# Altium PCB AS5048B_Breakout.PcbDoc
Units mil, origin at the board's own origin, x right, y up, seen from the top; angles counter-clockwise.
Board outline 1104.99 x 899.97 mil, 2 copper layers (Top Layer, Bottom Layer); 14 components, 9 nets, 46 pads, 48 vias.
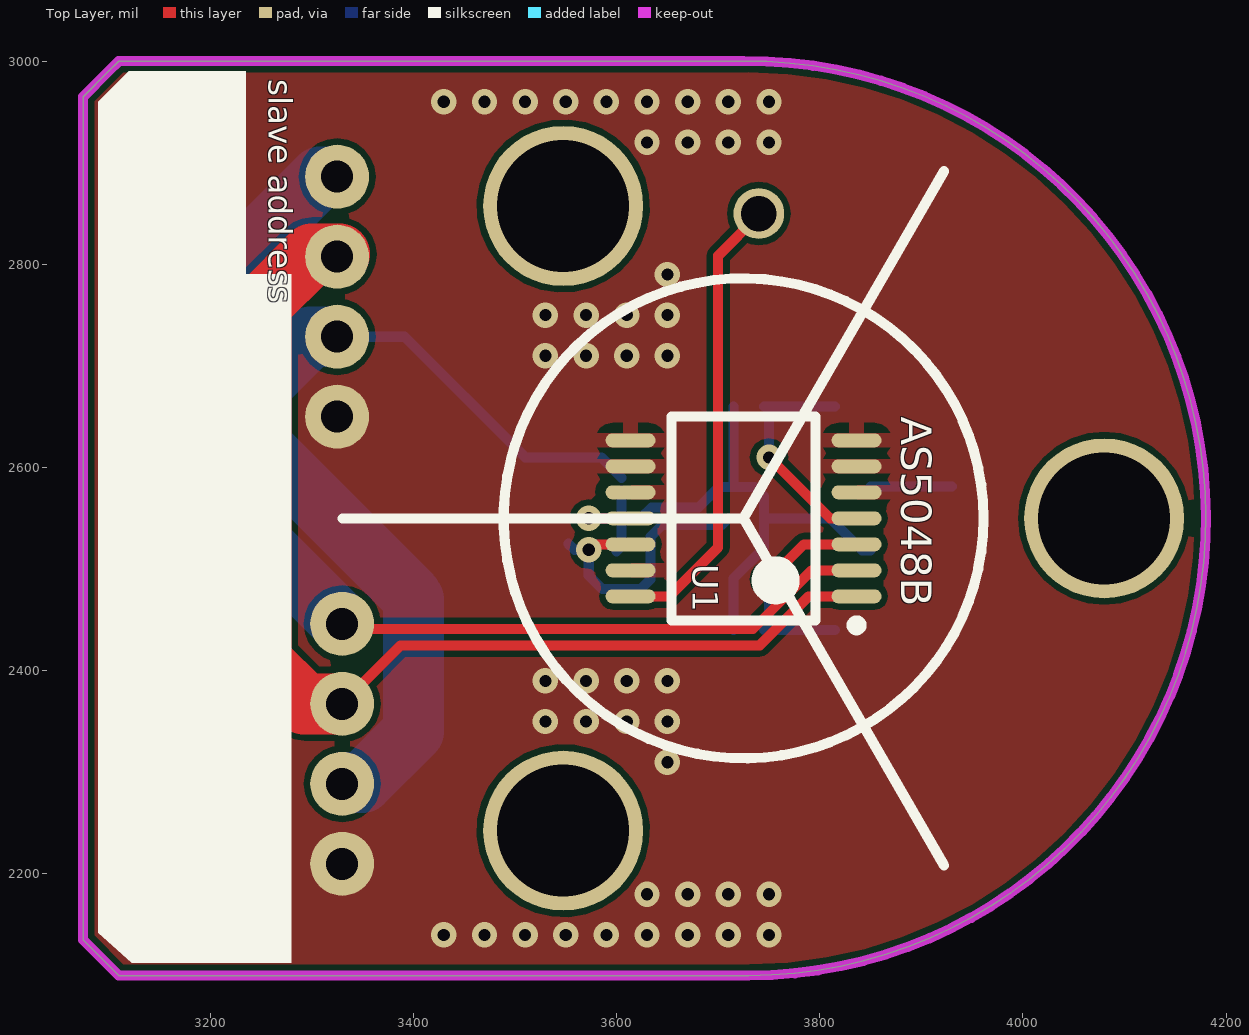
[diagram p0: Top Layer view]
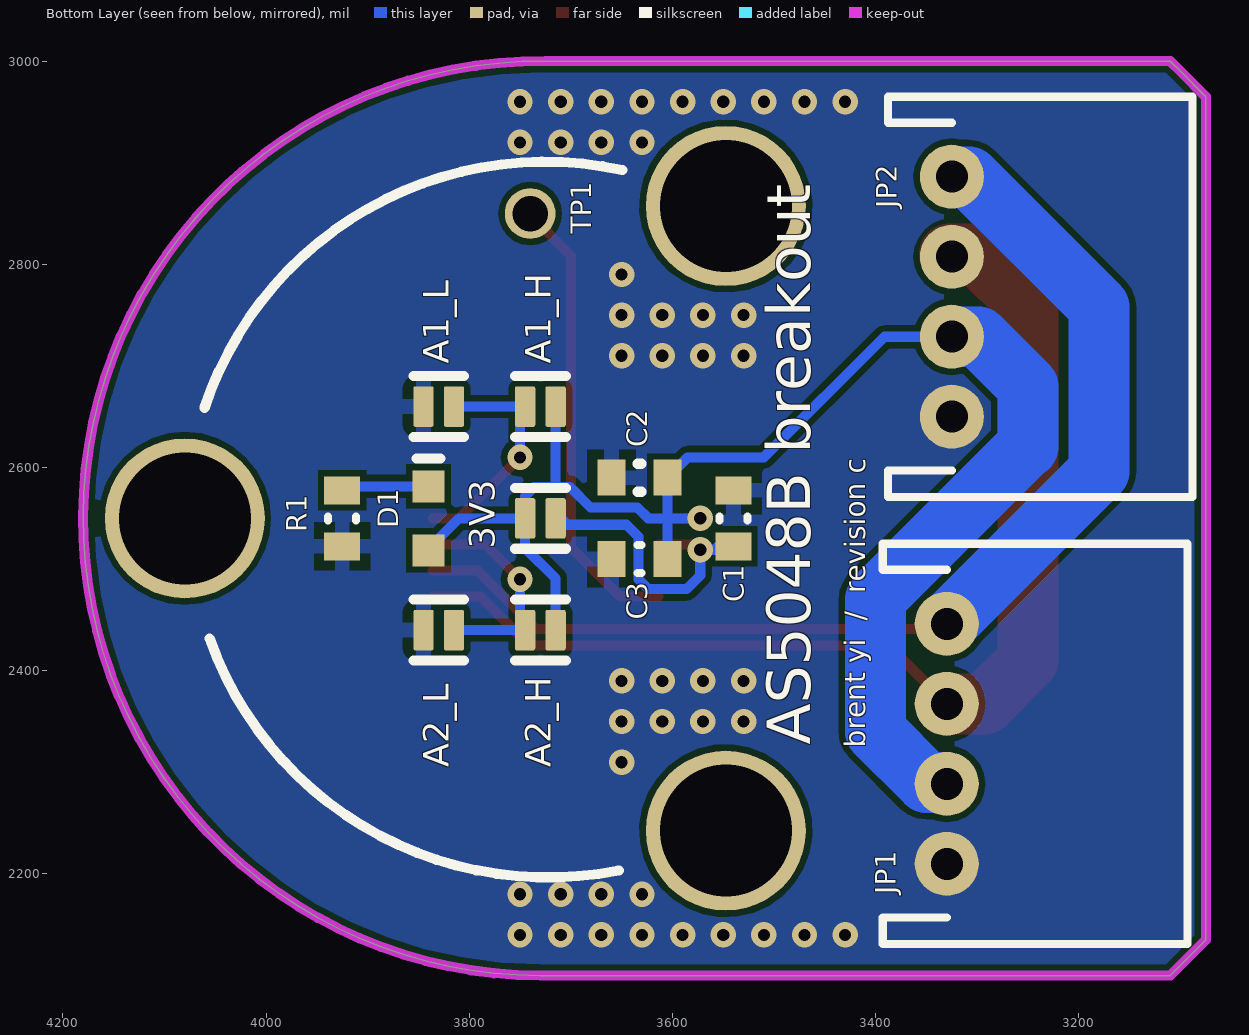
[diagram p1: Bottom Layer view, seen from below]

## Layer stack, top to bottom
Top Solder: solder mask 0.4, Solder Resist, Dk 3.5
Top Layer: signal copper 1.4
Dielectric 1: dielectric 12.6, FR-4, Dk 4.8
Bottom Layer: signal copper 1.4
Bottom Solder: solder mask 0.4, Solder Resist, Dk 3.5

## Board outline
3075,2135 3110,2100 3730,2100 ccw(c3730,2550) 3725.03,2999.97 3109.97,2999.97 3100,2990 3075,2965

## Design rules (kind name [scope] priority, off if disabled: settings)
Clearance [All] p1: gap=6
HoleSize [All] p1: absolutevalues=TRUE maxlimit=1000 minlimit=1 maxpercent=80.000 minpercent=20.000
PlaneConnect PlaneConnectVia [IsVia] p1: planeconnectstyle=Direct reliefexpansion=20 reliefentries=4 reliefconductorwidth=10 reliefairgap=10
PlaneConnect [All] p2: planeconnectstyle=Relief reliefexpansion=20 reliefentries=4 reliefconductorwidth=15 reliefairgap=10
PolygonConnect PolygonConnectJST [HasFootprint('JST-4-PTH-RIGHT-ANGLE')] p1: connectstyle=Direct reliefconductorwidth=10 reliefentries=4 polygonreliefangle="90 Angle" airgapwidth=10
PolygonConnect PolygonConnectVia [IsVia] p2: connectstyle=Direct reliefconductorwidth=10 reliefentries=4 polygonreliefangle="90 Angle" airgapwidth=10
PolygonConnect [All] p3: connectstyle=Relief reliefconductorwidth=15 reliefentries=4 polygonreliefangle="90 Angle" airgapwidth=10
RoutingVias [All] p1: holewidth=20 width=35 viastyle="Through Hole" minholewidth=20 minwidth=35 maxholewidth=20 maxwidth=35
SolderMaskExpansion SolderMaskExpansion_1 [IsVia] p1: expansion=1 soldermaskfromhole=TRUE
SolderMaskExpansion [All] p2: expansion=3
Width [All] p1: maxlimit=100 minlimit=10 preferedwidth=10
28 further rules are at their usual default settings.

## Components (designator, comment, footprint, x,y, rotation, side; value= is the part's Value field where it differs from the comment)
3V3 "Solder Jumper" "SOLDER JUMPER" 3730,2550 r180 bottom
A1_H "A1_H" "SOLDER JUMPER" 3730,2660 r180 bottom
A1_L "A1_L" "SOLDER JUMPER" 3830,2660 r180 bottom
A2_H "A2_H" "SOLDER JUMPER" 3730,2440 r180 bottom
A2_L "A2_L" "SOLDER JUMPER" 3830,2440 r180 bottom
C1 "10uF" CAPC0603(1608)100_L 3540,2550 r90 bottom
C2 "0.1uF" CAPC0603(1608)100_L 3632.44,2590 r180 bottom
C3 "2.2uF" CAPC0603(1608)100_L 3632.44,2510 r180 bottom
D1 "RED" 0603_A 3840,2550 r270 bottom
JP1 "JST_PH 4" JST-4-PTH-RIGHT-ANGLE 3330,2446.22 r270 bottom
JP2 "JST_PH 4" JST-4-PTH-RIGHT-ANGLE 3325,2886.22 r270 bottom
R1 "470R" RESC0603(1608)_L 3925,2550 r90 bottom
TP1 "Test Point" "TEST POINT" 3740,2850 r90 bottom
U1 "AS5048B-HTSP" AMS-TSSOP-14-5000X4400DE_L 3725,2550 r180 top

## Footprints (in the part's own frame and the unit in brackets; to place one, negate y for a bottom-side part, rotate by r counter-clockwise, add the part's x,y. Pads: shape width x height; smd on the part's side, far side on the other; paste and mask are expansions set on the pad)
0603_A [mm] "Chip LED, 2-Leads, Body 1.6x0.8mm, IPC Medium Density"
  rect 0.8x0.8 smd: 1(-0.8,0) 2(0.8,0)
  silkscreen extent -1.5,-0.3 -1.5,0.3, body extent -0.8,-0.4 0.8,0.4, height 0.7
AMS-TSSOP-14-5000X4400DE_L [mm] "TSOP, 14-Leads, Body 5.00x4.40mm, Pitch 0.65mm, IPC High Density"
  oval 1.25x0.35 smd: 1(-2.825,1.95) 2(-2.825,1.3) 3(-2.825,0.65) 4(-2.825,0) 5(-2.825,-0.65) 6(-2.825,-1.3) 7(-2.825,-1.95) 8(2.825,-1.95) 9(2.825,-1.3) 10(2.825,-0.65) 11(2.825,0) 12(2.825,0.65) 13(2.825,1.3) 14(2.825,1.95)
  silkscreen extent -2.95,-2.55 1.8,2.8, body extent -2.25,-2.55 2.25,2.55, height 1.2
CAPC0603(1608)100_L [mm] "Chip Capacitor, Body 1.6x0.8mm, Height 1.0mm, IPC High Density"
  rect 0.7x0.9 smd: 1(-0.7,0) 2(0.7,0)
  silkscreen extent -0.05,-0.35 0.05,0.35, body extent -0.87,-0.47 0.88,0.48, height 1
JST-4-PTH-RIGHT-ANGLE [mil]
  round 63 hole 31.5: 1(0,0) 2(78.74,0) 3(157.48,0) 4(236.22,0)
  silkscreen extent -79,-63 315,237, body extent -75,-60 315,239, height 193
RESC0603(1608)_L [mm] "Chip Resistor, Body 1.6x0.8mm, IPC High Density"
  rect 0.7x0.9 smd: 1(-0.7,0) 2(0.7,0)
  silkscreen extent -0.05,-0.35 0.05,0.35, body extent -0.85,-0.47 0.85,0.47, height 0.6
"SOLDER JUMPER" [mil]
  rrect20% 20x40 smd: 1(-15,0) 2(15,0)
  silkscreen extent -25,-30 25,30
"TEST POINT" [mil]
  round 50 hole 35: 1(0,0)

## Part data
A1_H A1_L A2_H A2_L: library part "Solder Jumper"
C1: library part CMP-1035-02796-1, "CAP 10uF 6.3V ±10% 0603 (1608 Metric) Thickness 1mm SMD"
C2: library part CMP-1035-02591-1, "CAP 100nF 50V ±5% 0603 (1608 Metric) Thickness 1mm SMD"
C3: library part CMP-1035-02767-1, "CAP 2.2uF 25V ±10% 0603 (1608 Metric) Thickness 1mm SMD"
D1: library part CMP-1426-00001-1, "SMD mono-color Chip LED, WL-SMCW, Red"
R1: library part CMP-1012-00066-1, "470R 0.1W 5% 0603 (1608 Metric)  SMD"
U1: library part CMP-0555-00031-2, "Magnetic Rotary Encoder 14-bit Angular Position Sensor, 3.3 or 5 V, TSSOP-14, Pb-Free, Reel"

## Free pads (board coordinates)
  round 157.48 hole 129.92: 3(3547.5,2242.56) 3(3547.5,2857.44) 3(4080,2550)

## Via types
v1: diameter 25, hole 12, Top Layer to Bottom Layer, 48 vias

## Nets (pads, with @x,y where several pads share a name; then routed paths per layer and width w, separated by ;. In a path a pad name is that pad's centre, name@x,y a point inside that pad or via, vN(x,y) a via of type N, cw(c..) or ccw(c..) an arc to the next point about the centre after c; other vN are vias at no path point)
3V3: 3V3.2 C1.1 U1.12 | length 292.7
  Top Layer w10: v1@3569.06,2515 3578.47,2524.41 U1.12
  Bottom Layer w10: C1.1@3552.56,2525 3558.56,2519 v1(3572.6,2519) 3572.6,2493.81 3586.13,2480.28 3623.63,2480.28 3633.35,2490 3633.35,2531.82 3645.19,2543.65 3703.65,2543.65 3V3.2@3710,2550
GND: A1_L.1 A2_L.1 C1.2 C2.1 C3.1 JP1.4 JP2.4 R1.1 U1.5 U1.6 U1.7 U1.8 U1.9 U1.10 U1.13
  other v1: 3430,2140 3470,2140 3510,2140 3550,2140 3590,2140 3630,2140 3670,2140 3710,2140 3750,2140 3630,2180 3670,2180 3710,2180 3750,2180 3650,2310 3530,2350 3570,2350 3610,2350 3650,2350 3530,2390 3570,2390 3610,2390 3650,2390 3530,2710 3570,2710 3610,2710 3650,2710 3530,2750 3570,2750 3610,2750 3650,2750 3650,2790 3630,2920 3670,2920 3710,2920 3750,2920 3430,2960 3470,2960 3510,2960 3550,2960 3590,2960 3630,2960 3670,2960 3710,2960 3750,2960
NetA1_H_1: A1_H.1 A1_L.2 U1.4 | length 231.1
  Top Layer w10: v1(3750,2610) 3810,2550 U1.4
  Bottom Layer w10: A1_H.1 A1_L.2 ; v1(3750,2610) A1_H.1@3750,2660
NetA2_H_1: A2_H.1 A2_L.2 U1.3 | length 220.5
  Top Layer w10: v1(3750,2490) 3784.41,2524.41 U1.3
  Bottom Layer w10: A2_H.1 A2_L.2 ; A2_H.1@3750,2440 v1(3750,2490)
NetD1_1: D1.1 R1.2 | length 80
  Bottom Layer w10: D1.1@3850,2581.5 3920,2581.5 R1.2@3930,2581.5
NetTP1_1: TP1.1 U1.14 | length 451.4
  Top Layer w10: U1.14 3651.85,2473.23 3700,2521.38 3700,2808.5 3740,2848.5 TP1.1
SCL: JP1.1 JP2.1 U1.2 | length 1114.8
  Top Layer w10: JP1.1@3325,2457.48 3342.48,2440 3343.48,2441 3734.23,2441 3792.05,2498.82 U1.2
  Bottom Layer w60: JP2.1 3308.28,2886.22 3180,2757.94 3180,2596.22 JP1.1
SDA: JP1.2 JP2.2 U1.1 | length 1099.4
  Top Layer w10: JP1.2 3387.52,2425 3740.86,2425 3789.09,2473.23 U1.1
  Top Layer w60: JP2.2 3327.52,2810 3300,2810 3250,2760 3250,2410 3292.52,2367.48 JP1.2
VCC: 3V3.1 A1_H.2 A2_H.2 C2.2 C3.2 D1.2 JP1.3 JP2.3 U1.11 | length 1577.9
  Top Layer w10: v1@3571,2550 3612.6,2550 U1.11@3613.19,2549.41
  Bottom Layer w10: JP1.3@3325,2300 JP1.3@3341.26,2300 ; JP2.3 3391.26,2728.74 3510,2610 3584.88,2610 C2.2 ; v1@3571,2550 3604.88,2550 ; C3.2@3600,2517.56 3604.88,2522.44 3604.88,2550 ; C2.2@3604.88,2577.56 3604.88,2550 ; A2_H.2 3715,2490.7 3745,2520.7 3V3.1 ; 3715,2581 A1_H.2 ; D1.2@3850,2518.5 3841.5,2518.5 3810,2550 3V3.1 ; 3604.88,2550 3623.93,2550 3634.59,2560.65 3680.65,2560.65 3701,2581 3736,2581 3745,2572 3V3.1
  Bottom Layer w60: JP2.3 3298.74,2728.74 3250,2680 3250,2620 3251.68,2620 3397.5,2474.18 3397.5,2472.5 3400,2470 3400,2340 3350,2290 JP1.3@3331.26,2290
  other v1: 3572.6,2550

## Polygon pours and split planes (outlines as drawn)
GND on Top Layer "Top" (solid, remove dead copper, pour order 0): 3075,2150 3125,2100 3730,2100 ccw(c3730,2550) 3725.03,2999.97 3124.97,2999.97 3115,2990 3075,2950
GND on Bottom Layer "Bottom" (solid, remove dead copper, pour order 1): 3075,2150 3125,2100 3730,2100 ccw(c3730,2550) 3725.03,2999.97 3124.97,2999.97 3115,2990 3075,2950

## Keep-outs
Keep-Out Layer:
  the board outline again, w10

## Silkscreen, mask and mechanical layers (free items; w line width, h text height)
Top Overlay:
  circle w10: c3725,2550 r236.22
  region: 3090,2960 3120,2990 3235,2990 3235,2790 3280,2790 3280,2112.62 3122.61,2112.62 3090,2142.33
  lines w10: 3330.55,2550 3725,2550 ; 3922.22,2208.4 3725,2550 ; 3922.22,2891.6 3725,2550
  text "slave address" at 3250,2982 h40 r270
  text "AS5048B" at 3880,2650 h30 r270
Bottom Overlay:
  lines w10: 3649.39,2892.77 cw(c3725,2547.5) 4060.56,2658.53 ; 3653.5,2203.5 3652.72,2203.5 ccw(c3722.5,2550) 4055.53,2431.59
  text "AS5048B breakout" at 3450,2327 h74 r270
  text "brent yi  /  revision c" at 3410,2324 h20 r270